# Altium PCB 28Pins_Schematic_V1I1_PCB.PcbDoc (part 3 of 5)
Units mm, origin at the board's own origin, x right, y up, seen from the top; angles counter-clockwise.
Board outline 68.58 x 53.34 mm, 2 copper layers (L1, L2), stack 1.67 mm thick; 106 components, 72 nets, 323 pads, 86 vias.
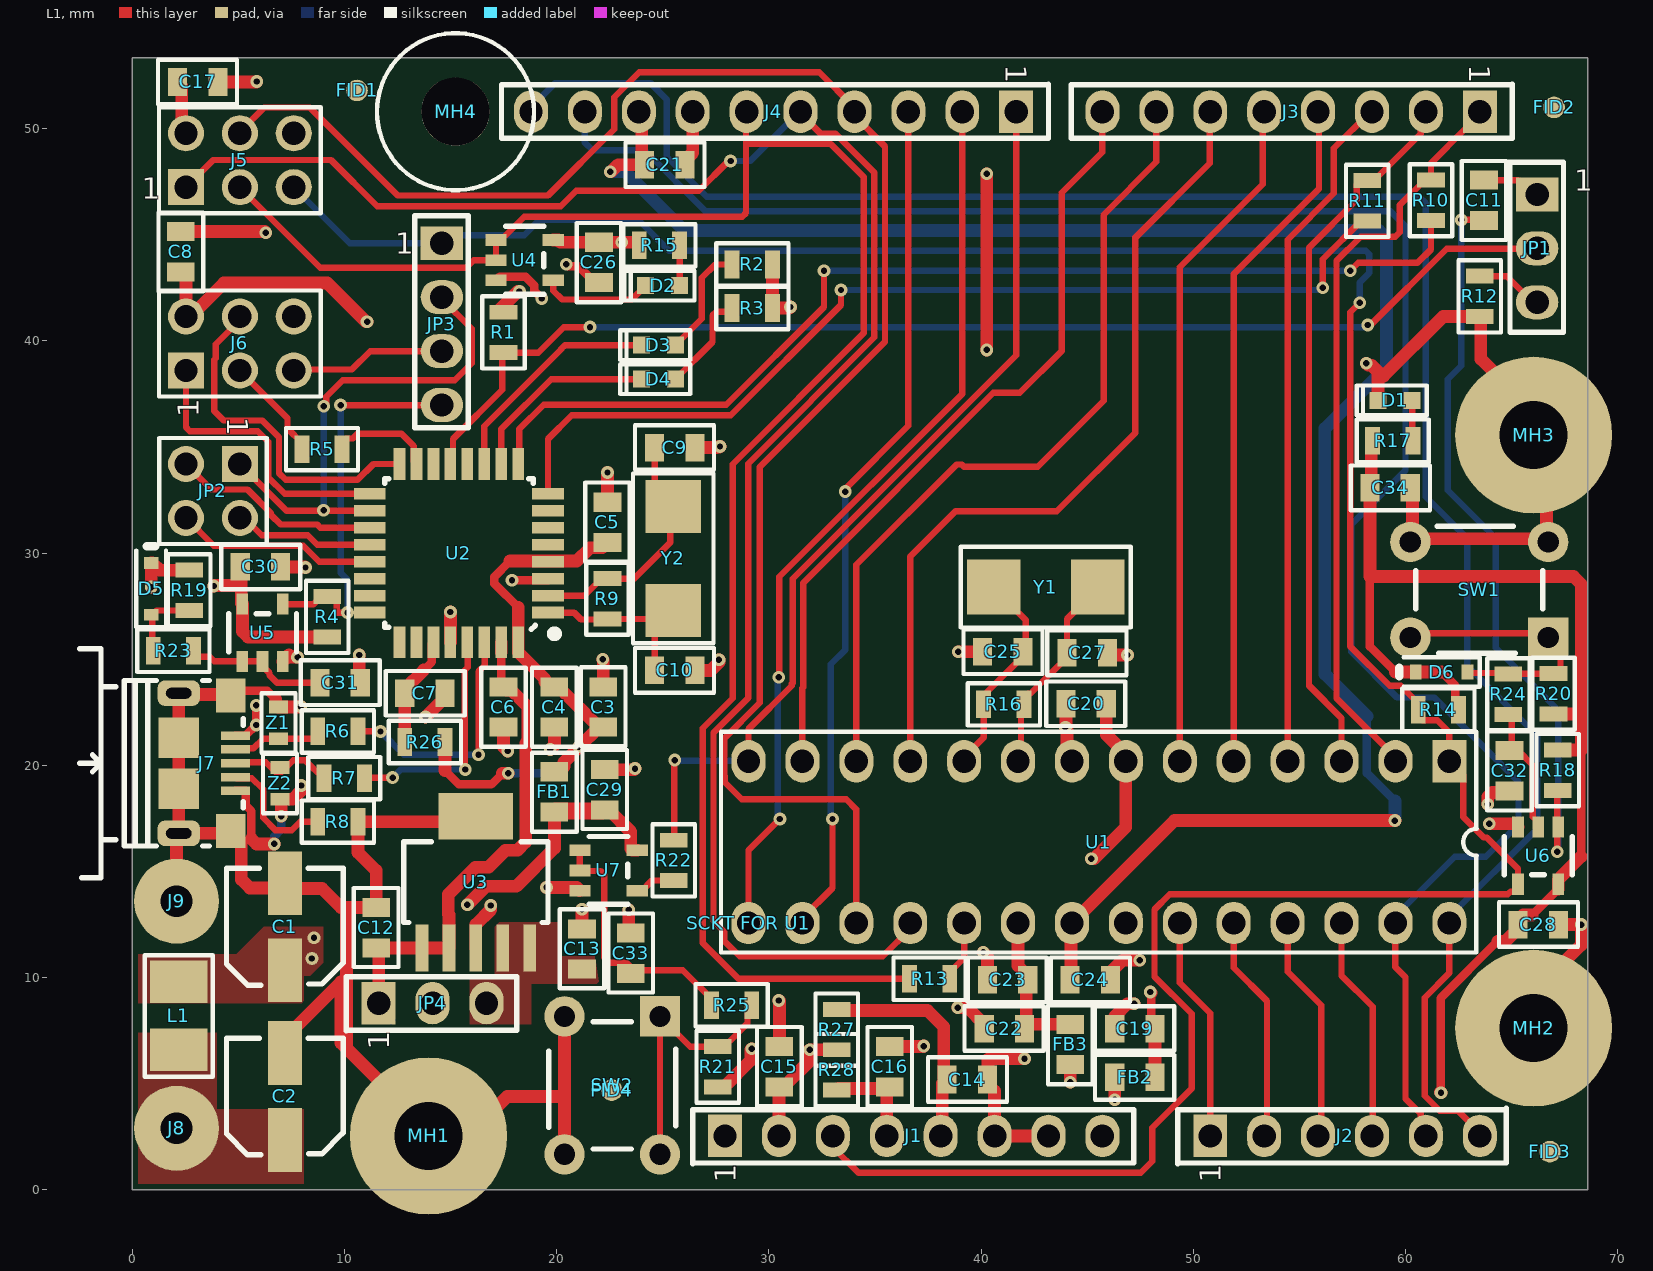
[diagram p0: L1 view]

## Part data (continued)
R4 R14 R18 R19 R20 R21: library part RC0805FR-0710KL, "Res Thick Film 0805 10K Ohm 1% 0.125W(1/8W) +/-100ppm/C Epoxy Pad SMD T/R", Case Code (Imperial)=0805, Manufacturer="Yageo Group", Max Operating Temperature=155°C, Max Power Dissipation=125mW, Min Operating Temperature=-55°C, Resistance=10kΩ, Supplier Part Number 1=311-10.0KCRCT-ND, Temperature Coefficient=100ppm/°C, Tolerance=1%, Voltage Rating=150V, Case/Package=0805, Category="Chip SMD Resistors", China RoHS=Non-Compliant, ComponentLink1Description=https://datasheet.octopart.com:443/RC0805FR-0710KL-Yageo-datasheet-175887523.pdf?src-supplier=IHS, ComponentLink1URL=https://datasheet.octopart.com:443/RC0805FR-0710KL-Yageo-datasheet-175887523.pdf?src-supplier=IHS, ComponentLink2Description=https://datasheet.octopart.com:443/RC0805FR-0710KL-Yageo-datasheet-62067350.pdf?src-supplier=Farnell, ComponentLink2URL=https://datasheet.octopart.com:443/RC0805FR-0710KL-Yageo-datasheet-62067350.pdf?src-supplier=Farnell, ComponentLink3Description=https://datasheet.octopart.com:443/RC0805FR-0710KL-Yageo-datasheet-13691069.pdf?src-supplier=Farnell, ComponentLink3URL=https://datasheet.octopart.com:443/RC0805FR-0710KL-Yageo-datasheet-13691069.pdf?src-supplier=Farnell, ComponentLink4Description=https://datasheet.octopart.com:443/RC0805FR-0710KL-Yageo-datasheet-103092701.pdf?src-supplier=Upverter, ComponentLink4URL=https://datasheet.octopart.com:443/RC0805FR-0710KL-Yageo-datasheet-103092701.pdf?src-supplier=Upverter, ComponentLink5Description=https://datasheet.octopart.com:443/RC0805FR-0710KL-Yageo-datasheet-98239111.pdf?src-supplier=Upverter, ComponentLink5URL=https://datasheet.octopart.com:443/RC0805FR-0710KL-Yageo-datasheet-98239111.pdf?src-supplier=Upverter, ComponentLink6Description=https://datasheet.octopart.com:443/RC0805FR-0710KL-Yageo---Phycomp-datasheet-67302840.pdf?src-supplier=Upverter, ComponentLink6URL=https://datasheet.octopart.com:443/RC0805FR-0710KL-Yageo---Phycomp-datasheet-67302840.pdf?src-supplier=Upverter, ComponentLink7Description=https://datasheet.octopart.com:443/RC0805FR-0710KL-Yageo-datasheet-8330313.pdf?src-supplier=element14+APAC, ComponentLink7URL=https://datasheet.octopart.com:443/RC0805FR-0710KL-Yageo-datasheet-8330313.pdf?src-supplier=element14+APAC, ComponentLink8Description=https://datasheet.octopart.com:443/RC0805FR-0710KL-Yageo-datasheet-12592811.pdf?src-supplier=element14+APAC, ComponentLink8URL=https://datasheet.octopart.com:443/RC0805FR-0710KL-Yageo-datasheet-12592811.pdf?src-supplier=element14+APAC, ComponentLink9Description=https://datasheet.octopart.com:443/RC0805FR-0710KL-Yageo-datasheet-164759695.pdf?src-supplier=Future+Electronics, ComponentLink9URL=https://datasheet.octopart.com:443/RC0805FR-0710KL-Yageo-datasheet-164759695.pdf?src-supplier=Future+Electronics, ComponentLink10Description=https://datasheet.octopart.com:443/RC0805FR-0710KL-Yageo-datasheet-15800360.pdf?src-supplier=Future+Electronics, ComponentLink10URL=https://datasheet.octopart.com:443/RC0805FR-0710KL-Yageo-datasheet-15800360.pdf?src-supplier=Future+Electronics, ComponentLink11Description=https://datasheet.octopart.com:443/RC0805FR-0710KL-Yageo-datasheet-8324252.pdf?src-supplier=Future+Electronics, ComponentLink11URL=https://datasheet.octopart.com:443/RC0805FR-0710KL-Yageo-datasheet-8324252.pdf?src-supplier=Future+Electronics, ComponentLink12Description=https://datasheet.octopart.com:443/RC0805FR-0710KL-Yageo-datasheet-79472498.pdf?src-supplier=Megastar, ComponentLink12URL=https://datasheet.octopart.com:443/RC0805FR-0710KL-Yageo-datasheet-79472498.pdf?src-supplier=Megastar, ComponentLink13Description=https://datasheet.octopart.com:443/RC0805FR-0710KL-Yageo-datasheet-27714392.pdf?src-supplier=Seeed+Studio, ComponentLink13URL=https://datasheet.octopart.com:443/RC0805FR-0710KL-Yageo-datasheet-27714392.pdf?src-supplier=Seeed+Studio, ComponentLink14Description=https://datasheet.octopart.com/RC0805FR-0710KL-Yageo-datasheet-73766026.pdf, ComponentLink14URL=https://datasheet.octopart.com/RC0805FR-0710KL-Yageo-datasheet-73766026.pdf, ComponentLink15Description=https://datasheet.octopart.com:443/RC0805FR-0710KL-Yageo-datasheet-118657.pdf?src-supplier=DigiKey, ComponentLink15URL=https://datasheet.octopart.com:443/RC0805FR-0710KL-Yageo-datasheet-118657.pdf?src-supplier=DigiKey, ComponentLink16Description=https://datasheet.octopart.com:443/RC0805FR-0710KL-Yageo-datasheet-502840.pdf?src-supplier=element14, ComponentLink16URL=https://datasheet.octopart.com:443/RC0805FR-0710KL-Yageo-datasheet-502840.pdf?src-supplier=element14, ComponentLink17Description=http://sigma.octopart.com:80/rohs_statement/Yageo-company-2.pdf?src-supplier=Compliance+Statements, ComponentLink17URL=http://sigma.octopart.com:80/rohs_statement/Yageo-company-2.pdf?src-supplier=Compliance+Statements, ComponentLink18Description=http://sigma.octopart.com:80/conflict_mineral_statement/Yageo-company-3.pdf?src-supplier=Compliance+Statements, ComponentLink18URL=http://sigma.octopart.com:80/conflict_mineral_statement/Yageo-company-3.pdf?src-supplier=Compliance+Statements, Composition="Thick Film", Depth=1.25mm, Features="Moisture Resistant", Height=500µm, Lead Free="Lead Free", Length=2mm, Lifecycle Status=Production, Manufacturer Part Number=RC0805FR-0710KL, Military Standard=Not, Mount="Surface Mount", Number of Pins=2, Number of Terminals=2, Number of Terminations=2, Packaging="Tape and Reel", Power Dissipation=125mW, Power Rating=125mW, Pricing 1="1=0.15, 10=0.016, 25=0.0136, 50=0.0112, 100=0.0071, 5000=0.0051, 10000=0.00453, 15000=0.00435, 25000=0.00426, 120000=0.00398, 125000=0.00396 (USD)", REACH SVHC=Yes, RoHS=Compliant, Schedule B="8533210045, 8533210045|8533210045|8533210045|8533210045|8533210045|8533210045|8533210045|8533210045|8533210045|8533210045|8533210045|8533210045|8533210045|8533210045|8533210045|8533210045|8533210045|8533210045|8533210045|8533210045|8533210045|8533210045|8533210045|85", Stock 1=3015885, Supplier 1=DigiKey, Termination=SMD/SMT, Voltage Rating (AC)=150V, Width=1.25mm, Working Voltage=150V
R5 R6 R7 R13 R23 R24 R25: library part AR0805FR-0722RL, "Chip Resistor with Ni/Au Terminations Thick Film 0805 22Ohm 1% Paper T/R", Case/Package=0805, Manufacturer="Yageo Group", Max Operating Temperature=155°C, Max Power Dissipation=125mW, Min Operating Temperature=-55°C, Resistance=22Ω, Supplier Part Number 1=AR0805FR-0722RL-ND, Temperature Coefficient=100ppm/°C, Tolerance=1%, Working Voltage=150V, Category="Chip SMD Resistors", China RoHS=Non-Compliant, ComponentLink1Description=https://datasheet.octopart.com:443/AR0805FR-0722RL-Yageo-datasheet-13033997.pdf?src-supplier=IHS, ComponentLink1URL=https://datasheet.octopart.com:443/AR0805FR-0722RL-Yageo-datasheet-13033997.pdf?src-supplier=IHS, ComponentLink2Description=http://sigma.octopart.com:80/rohs_statement/Yageo-company-2.pdf?src-supplier=Compliance+Statements, ComponentLink2URL=http://sigma.octopart.com:80/rohs_statement/Yageo-company-2.pdf?src-supplier=Compliance+Statements, ComponentLink3Description=http://sigma.octopart.com:80/conflict_mineral_statement/Yageo-company-3.pdf?src-supplier=Compliance+Statements, ComponentLink3URL=http://sigma.octopart.com:80/conflict_mineral_statement/Yageo-company-3.pdf?src-supplier=Compliance+Statements, Composition="Thick Film", Features="Moisture Resistant", Height=500µm, Length=2.0066mm, Lifecycle Status=Production, Manufacturer Part Number=AR0805FR-0722RL, Mount="Surface Mount", Number of Terminals=2, Number of Terminations=2, Packaging="Tape & Reel", Power Dissipation=125mW, Pricing 1="5000=0.08092 (USD)", REACH SVHC=Yes, RoHS=Compliant, Supplier 1=DigiKey, Width=1.25mm
R8 R26 R27 R28: library part RC0805JR-070RP, "Zero Ohm Resistor, Jumper, 0805 [2012 Metric], Thick Film, 125 mW, 2 A, Surface Mount Device", Case Code (Imperial)=0805, Case Code (Metric)=2012, Manufacturer="Yageo Group", Max Operating Temperature=155°C, Max Power Dissipation=125mW, Min Operating Temperature=-55°C, Resistance=0Ω, Supplier Part Number 1=YAG1327DKR-ND, Case/Package=0805, Category="Chip SMD Resistors", China RoHS=Compliant, ComponentLink1Description=https://datasheet.octopart.com:443/RC0805JR-070RP-Yageo-datasheet-182189537.pdf?src-supplier=IHS, ComponentLink1URL=https://datasheet.octopart.com:443/RC0805JR-070RP-Yageo-datasheet-182189537.pdf?src-supplier=IHS, ComponentLink2Description=https://datasheet.octopart.com:443/RC0805JR-070RP-Yageo-Group-datasheet-165992757.pdf?src-supplier=ODG+(Origin+Data+Global), ComponentLink2URL=https://datasheet.octopart.com:443/RC0805JR-070RP-Yageo-Group-datasheet-165992757.pdf?src-supplier=ODG+(Origin+Data+Global), ComponentLink3Description=http://sigma.octopart.com:80/rohs_statement/Yageo-company-2.pdf?src-supplier=Compliance+Statements, ComponentLink3URL=http://sigma.octopart.com:80/rohs_statement/Yageo-company-2.pdf?src-supplier=Compliance+Statements, ComponentLink4Description=http://sigma.octopart.com:80/conflict_mineral_statement/Yageo-company-3.pdf?src-supplier=Compliance+Statements, ComponentLink4URL=http://sigma.octopart.com:80/conflict_mineral_statement/Yageo-company-3.pdf?src-supplier=Compliance+Statements, Composition="Thick Film", Features="Moisture Resistant", Height=500µm, Length=2.0066mm, Lifecycle Status=Production, Manufacturer Part Number=RC0805JR-070RP, Mount="Surface Mount", Number of Terminals=2, Number of Terminations=2, Power Dissipation=125mW, Pricing 1="1=0.1, 10=0.029, 25=0.0244, 50=0.0212, 100=0.0186, 250=0.01572, 500=0.01392, 1000=0.01238 (USD)", REACH SVHC=Yes, RoHS=Compliant, Stock 1=60533, Supplier 1=DigiKey, Width=1.25mm
R9 R16: library part RT0805BRE071ML, "Res Thin Film 0805 1M Ohm 0.1% 0.125W(1/8W) ±50ppm/C Pad SMD T/R", Case Code (Imperial)=0805, Manufacturer="Yageo Group", Max Operating Temperature=155°C, Min Operating Temperature=-55°C, Power Dissipation=125mW, Resistance=1MΩ, Supplier Part Number 1=YAG4967CT-ND, Temperature Coefficient=50ppm/°C, Tolerance=0.1%, Voltage Rating=150V, Case/Package=0805, Category="Chip SMD Resistors", China RoHS=Non-Compliant, ComponentLink1Description=https://datasheet.octopart.com:443/RT0805BRE071ML-Yageo-datasheet-176402239.pdf?src-supplier=Newark, ComponentLink1URL=https://datasheet.octopart.com:443/RT0805BRE071ML-Yageo-datasheet-176402239.pdf?src-supplier=Newark, ComponentLink2Description=https://datasheet.octopart.com:443/RT0805BRE071ML-Yageo-datasheet-169971040.pdf?src-supplier=Future+Electronics, ComponentLink2URL=https://datasheet.octopart.com:443/RT0805BRE071ML-Yageo-datasheet-169971040.pdf?src-supplier=Future+Electronics, ComponentLink3Description=https://datasheet.octopart.com:443/RT0805BRE071ML-Yageo-datasheet-166250672.pdf?src-supplier=Future+Electronics, ComponentLink3URL=https://datasheet.octopart.com:443/RT0805BRE071ML-Yageo-datasheet-166250672.pdf?src-supplier=Future+Electronics, ComponentLink4Description=https://datasheet.octopart.com:443/RT0805BRE071ML-Yageo-datasheet-141265893.pdf?src-supplier=Future+Electronics, ComponentLink4URL=https://datasheet.octopart.com:443/RT0805BRE071ML-Yageo-datasheet-141265893.pdf?src-supplier=Future+Electronics, ComponentLink5Description=https://datasheet.octopart.com/RT0805BRE071ML-Yageo-datasheet-86813807.pdf, ComponentLink5URL=https://datasheet.octopart.com/RT0805BRE071ML-Yageo-datasheet-86813807.pdf, ComponentLink6Description=http://sigma.octopart.com:80/rohs_statement/Yageo-company-2.pdf?src-supplier=Compliance+Statements, ComponentLink6URL=http://sigma.octopart.com:80/rohs_statement/Yageo-company-2.pdf?src-supplier=Compliance+Statements, ComponentLink7Description=http://sigma.octopart.com:80/conflict_mineral_statement/Yageo-company-3.pdf?src-supplier=Compliance+Statements, ComponentLink7URL=http://sigma.octopart.com:80/conflict_mineral_statement/Yageo-company-3.pdf?src-supplier=Compliance+Statements, Composition="Thin Film", Contact Plating=Tin, Height=500µm, Lead Free="Lead Free", Length=2mm, Lifecycle Status=Production, Manufacturer Part Number=RT0805BRE071ML, Mount="Surface Mount", Number of Terminals=2, Power Rating=125mW, Pricing 1="1=0.23, 10=0.15, 25=0.1424, 50=0.1346, 100=0.1178, 250=0.10096, 500=0.0773 (USD)", Radiation Hardening=No, REACH SVHC=Yes, RoHS=Compliant, Stock 1=10247, Supplier 1=DigiKey, Termination=SMD/SMT, Voltage Rating (DC)=150V, Width=1.25mm, Working Voltage=150V
R10 R11 R12: library part AT0805FRE071KL, "Fixed Resistor, Thin Film, 0.125W, 1000ohm, 150V, 1% +/-Tol, 50ppm/Cel, Surface Mount, 0805", Case/Package=0805, Manufacturer="Yageo Group", Max Operating Temperature=155°C, Min Operating Temperature=-55°C, Power Dissipation=125mW, Resistance=1kΩ, Supplier Part Number 1=13-AT0805FRE071KLCT-ND, Temperature Coefficient=50ppm/°C, Tolerance=1%, Voltage Rating=150V, Category="Chip SMD Resistors", China RoHS=Compliant, ComponentLink1Description=https://datasheet.octopart.com:443/AT0805FRE071KL-Yageo-datasheet-182189409.pdf?src-supplier=IHS, ComponentLink1URL=https://datasheet.octopart.com:443/AT0805FRE071KL-Yageo-datasheet-182189409.pdf?src-supplier=IHS, ComponentLink2Description=https://datasheet.octopart.com:443/AT0805FRE071KL-Yageo-datasheet-153645570.pdf?src-supplier=Upverter, ComponentLink2URL=https://datasheet.octopart.com:443/AT0805FRE071KL-Yageo-datasheet-153645570.pdf?src-supplier=Upverter, ComponentLink3Description=https://sigma.octopart.com:443/138820526/technical_drawing/Yageo-AT0805FRE071KL.pdf?src-supplier=Upverter, ComponentLink3URL=https://sigma.octopart.com:443/138820526/technical_drawing/Yageo-AT0805FRE071KL.pdf?src-supplier=Upverter, ComponentLink4Description=http://sigma.octopart.com:80/conflict_mineral_statement/Yageo-company-3.pdf?src-supplier=Compliance+Statements, ComponentLink4URL=http://sigma.octopart.com:80/conflict_mineral_statement/Yageo-company-3.pdf?src-supplier=Compliance+Statements, ComponentLink5Description=http://sigma.octopart.com:80/rohs_statement/Yageo-company-2.pdf?src-supplier=Compliance+Statements, ComponentLink5URL=http://sigma.octopart.com:80/rohs_statement/Yageo-company-2.pdf?src-supplier=Compliance+Statements, Composition="Thin Film", Height=500µm, Lifecycle Status=Production, Manufacturer Part Number=AT0805FRE071KL, Mount="Surface Mount", Number of Terminals=2, Power Rating=125mW, Pricing 1="1=0.39, 10=0.286, 25=0.2428, 50=0.2, 100=0.1754, 250=0.15096, 500=0.11846 (USD)", REACH SVHC=Yes, RoHS=Compliant, Stock 1=4559, Supplier 1=DigiKey, Width=1.25mm, Working Voltage=150V
"SCKT FOR U1": library part 4828-3004-CP, "IC Socket, DIP28, 28 Contact(s), 2.54mm Term Pitch, 7.62mm Row Spacing, Solder", Current Rating=1A, Insulation Resistance=5GΩ, Manufacturer=3M, Max Operating Temperature=85°C, Min Operating Temperature=-25°C, Supplier Part Number 1=3M5480-ND, Category=Connectors, China RoHS=Compliant, ComponentLink1Description=https://datasheet.octopart.com:443/4828-3004-CP-3M-datasheet-11754339.pdf?src-supplier=element14+APAC, ComponentLink1URL=https://datasheet.octopart.com:443/4828-3004-CP-3M-datasheet-11754339.pdf?src-supplier=element14+APAC, ComponentLink2Description=https://datasheet.octopart.com:443/4828-3004-CP-3M-datasheet-125432.pdf?src-supplier=Verical, ComponentLink2URL=https://datasheet.octopart.com:443/4828-3004-CP-3M-datasheet-125432.pdf?src-supplier=Verical, ComponentLink3Description=https://datasheet.octopart.com:443/4828-3004-CP-3M-datasheet-110561487.pdf?src-supplier=RS+(Formerly+Allied+Electronics), ComponentLink3URL=https://datasheet.octopart.com:443/4828-3004-CP-3M-datasheet-110561487.pdf?src-supplier=RS+(Formerly+Allied+Electronics), ComponentLink4Description=https://datasheet.octopart.com:443/4828-3004-CP-3M-datasheet-12002015.pdf?src-supplier=RS+(Formerly+Allied+Electronics), ComponentLink4URL=https://datasheet.octopart.com:443/4828-3004-CP-3M-datasheet-12002015.pdf?src-supplier=RS+(Formerly+Allied+Electronics), ComponentLink5Description=http://sigma.octopart.com:80/conflict_mineral_statement/3M-company-24.pdf?src-supplier=Compliance+Statements, ComponentLink5URL=http://sigma.octopart.com:80/conflict_mineral_statement/3M-company-24.pdf?src-supplier=Compliance+Statements, Connector Type="DIP, Socket", Contact Material=Bronze, Contact Plating=Tin, Depth=5.08mm, Gender=Female, Housing Material=Glass, Lead Free="Lead Free", Length=35.43mm, Lifecycle Status=Production, Manufacturer Part Number=4828-3004-CP, Mount="Through Hole", Number of Contacts=28, Number of Pins=28, Number of Positions=28, Number of Rows=2, Orientation=Straight, Pitch=2.54mm, Pricing 1="1=0.96, 14=0.79786, 28=0.75929, 56=0.72304, 112=0.68848, 252=0.65016, 504=0.61911, 1008=0.58954, 2506=0.55285 (USD)", REACH SVHC=Yes, RoHS=Compliant, Row Spacing=7.62mm, Stock 1=5321, Supplier 1=DigiKey, Terminal Pitch=2.54mm, Termination=Solder, Width=10.16mm
SW1 SW2: "Switch Tactile OFF (ON) SPST Round Button PC Pins 0.05A 24VDC 1.57N Thru-Hole Loose", Color=Black, Contact Current Rating=50mA, Contact Resistance=100mΩ, Insulation Resistance=100MΩ, Manufacturer="TE Connectivity", Manufacturer Lifecycle Status=ACTIVE, Max Operating Temperature=85°C, Max Voltage Rating (DC)=24V, Min Operating Temperature=-35°C, Operating Force=1.568N, Supplier Part Number 1=450-1650-ND, Actuator Length=1.397mm, Actuator Material="PBT, Polyacetal, Resin", Category="Pushbutton Switches", China RoHS=Compliant, ComponentLink1Description=https://datasheet.octopart.com:443/1825910-6-TE-Connectivity-datasheet-10294628.pdf?src-supplier=Newark, ComponentLink1URL=https://datasheet.octopart.com:443/1825910-6-TE-Connectivity-datasheet-10294628.pdf?src-supplier=Newark, ComponentLink2Description=https://datasheet.octopart.com:443/1825910-6-TE-Connectivity-datasheet-179971975.pdf?src-supplier=IHS, ComponentLink2URL=https://datasheet.octopart.com:443/1825910-6-TE-Connectivity-datasheet-179971975.pdf?src-supplier=IHS, ComponentLink3Description=https://datasheet.octopart.com:443/FSM4JH-TE-Connectivity---AMP-datasheet-512274.pdf?src-supplier=IHS, ComponentLink3URL=https://datasheet.octopart.com:443/FSM4JH-TE-Connectivity---AMP-datasheet-512274.pdf?src-supplier=IHS, ComponentLink4Description=https://datasheet.octopart.com:443/1825910-6-TE-Connectivity---Alcoswitch-datasheet-181441334.pdf?src-supplier=IHS, ComponentLink4URL=https://datasheet.octopart.com:443/1825910-6-TE-Connectivity---Alcoswitch-datasheet-181441334.pdf?src-supplier=IHS, ComponentLink5Description=https://datasheet.octopart.com:443/FSM4JH-TE-Connectivity-datasheet-181317608.pdf?src-supplier=IHS, ComponentLink5URL=https://datasheet.octopart.com:443/FSM4JH-TE-Connectivity-datasheet-181317608.pdf?src-supplier=IHS, ComponentLink6Description=https://sigma.octopart.com:443/101748000/technical_drawing/TE-Connectivity-1825910-6.pdf?src-supplier=Sager+Electronics, ComponentLink6URL=https://sigma.octopart.com:443/101748000/technical_drawing/TE-Connectivity-1825910-6.pdf?src-supplier=Sager+Electronics, ComponentLink7Description=https://sigma.octopart.com:443/12291753/technical_drawing/TE-Connectivity-1825910-6.pdf?src-supplier=Burklin+Elektronik, ComponentLink7URL=https://sigma.octopart.com:443/12291753/technical_drawing/TE-Connectivity-1825910-6.pdf?src-supplier=Burklin+Elektronik, ComponentLink8Description=https://datasheet.octopart.com:443/FSM4JH-Tyco-Electronics-datasheet-5302851.pdf?src-supplier=Upverter, ComponentLink8URL=https://datasheet.octopart.com:443/FSM4JH-Tyco-Electronics-datasheet-5302851.pdf?src-supplier=Upverter, ComponentLink9Description=https://sigma.octopart.com:443/58177301/technical_drawing/TE-Connectivity-1825910-6.pdf?src-supplier=TE+Connectivity, ComponentLink9URL=https://sigma.octopart.com:443/58177301/technical_drawing/TE-Connectivity-1825910-6.pdf?src-supplier=TE+Connectivity, ComponentLink10Description=https://datasheet.octopart.com:443/1825910-6-TE-Connectivity-datasheet-33021037.pdf?src-supplier=Farnell, ComponentLink10URL=https://datasheet.octopart.com:443/1825910-6-TE-Connectivity-datasheet-33021037.pdf?src-supplier=Farnell, ComponentLink11Description=https://datasheet.octopart.com:443/FSM4JH-Tyco-Electronics-datasheet-12163206.pdf?src-supplier=Farnell, ComponentLink11URL=https://datasheet.octopart.com:443/FSM4JH-Tyco-Electronics-datasheet-12163206.pdf?src-supplier=Farnell, ComponentLink12Description=https://datasheet.octopart.com:443/FSM4JH-Alcoswitch-datasheet-41434433.pdf?src-supplier=Master+Electronics, ComponentLink12URL=https://datasheet.octopart.com:443/FSM4JH-Alcoswitch-datasheet-41434433.pdf?src-supplier=Master+Electronics, ComponentLink13Description=https://datasheet.octopart.com:443/1825910-6-TE-Connectivity---AMP-datasheet-189108451.pdf?src-supplier=Master+Electronics, ComponentLink13URL=https://datasheet.octopart.com:443/1825910-6-TE-Connectivity---AMP-datasheet-189108451.pdf?src-supplier=Master+Electronics, ComponentLink14Description=https://datasheet.octopart.com:443/1825910-6-TE-Connectivity-datasheet-145419878.pdf?src-supplier=RS+(Formerly+Allied+Electronics), ComponentLink14URL=https://datasheet.octopart.com:443/1825910-6-TE-Connectivity-datasheet-145419878.pdf?src-supplier=RS+(Formerly+Allied+Electronics), ComponentLink15Description=https://datasheet.octopart.com:443/FSM4JH-Agastat-datasheet-15984561.pdf?src-supplier=RS+(Formerly+Allied+Electronics), ComponentLink15URL=https://datasheet.octopart.com:443/FSM4JH-Agastat-datasheet-15984561.pdf?src-supplier=RS+(Formerly+Allied+Electronics), ComponentLink16Description=https://datasheet.octopart.com:443/1825910-6-TE-Connectivity-datasheet-140613545.pdf?src-supplier=TME, ComponentLink16URL=https://datasheet.octopart.com:443/1825910-6-TE-Connectivity-datasheet-140613545.pdf?src-supplier=TME, ComponentLink17Description=https://datasheet.octopart.com:443/1825910-6-TE-Connectivity---AMP-datasheet-23715110.pdf?src-supplier=Electro+Sonic, ComponentLink17URL=https://datasheet.octopart.com:443/1825910-6-TE-Connectivity---AMP-datasheet-23715110.pdf?src-supplier=Electro+Sonic, ComponentLink18Description=http://sigma.octopart.com:80/14574207/rohs_statement/TE-Connectivity-1825910-6.pdf?src-supplier=Compliance+Statements, ComponentLink18URL=http://sigma.octopart.com:80/14574207/rohs_statement/TE-Connectivity-1825910-6.pdf?src-supplier=Compliance+Statements, ComponentLink19Description=http://sigma.octopart.com:80/41598133/materials_sheet/TE-Connectivity-1825910-6.pdf?src-supplier=Compliance+Statements, ComponentLink19URL=http://sigma.octopart.com:80/41598133/materials_sheet/TE-Connectivity-1825910-6.pdf?src-supplier=Compliance+Statements, ComponentLink20Description=http://sigma.octopart.com:80/78006367/materials_sheet/TE-Connectivity-1825910-6.pdf?src-supplier=Compliance+Statements, ComponentLink20URL=http://sigma.octopart.com:80/78006367/materials_sheet/TE-Connectivity-1825910-6.pdf?src-supplier=Compliance+Statements, ComponentLink21Description=http://sigma.octopart.com:80/136693561/materials_sheet/TE-Connectivity-1825910-6.pdf?src-supplier=Compliance+Statements, ComponentLink21URL=http://sigma.octopart.com:80/136693561/materials_sheet/TE-Connectivity-1825910-6.pdf?src-supplier=Compliance+Statements, ComponentLink22Description=http://sigma.octopart.com:80/14555950/rohs_certificate/Agastat-FSM4JH.pdf?src-supplier=Compliance+Statements, ComponentLink22URL=http://sigma.octopart.com:80/14555950/rohs_certificate/Agastat-FSM4JH.pdf?src-supplier=Compliance+Statements, Contact Material=Copper, Contact Plating=Silver, Current Rating=50mA, Electrical Life=100kcycles, ELV=Compliant, Height=3.61mm, Housing Material=Nylon, Illumination Type="Illuminated, Non-Illuminated", Lead Free="Lead Free", Length=5.99mm, Life (Cycles)=100kcycles, Lifecycle Status=Production, Manufacturer Part Number=1825910-6, Material=Nylon, Max Current Rating=50mA, Mechanical Life=100kcycles, Mount="Through Hole", Number of Positions=1, Orientation=Straight, Packaging=Bulk, Pricing 1="1=0.13, 10=0.118, 25=0.1112, 100=0.1001, 250=0.093, 750=0.08485, 1500=0.08009, 3000=0.07565, 5250=0.07234 (USD)", REACH SVHC=Yes, RoHS=Compliant, Stock 1=107767, Supplier 1=DigiKey, Switch Function=Off-Mom, Switch Travel=250µm, Termination="PC Pin, PC Pins", Throw Configuration=SPST, Type=Switch, Voltage Rating (DC)=24V, Width=6mm
U1: "Microchip - ATMEGA328P-PU - Microcontroller Mcu, 8 Bit, Atmega, 20MHZ, DIP-28", Case/Package=PDIP, Frequency=20MHz, Manufacturer=Microchip, Max Operating Temperature=85°C, Max Supply Voltage=5.5V, Min Operating Temperature=-40°C, Min Supply Voltage=1.8V, Supplier Part Number 1=ATMEGA328P-PU-ND, Category=Microcontrollers, ComponentLink1Description=https://datasheet.octopart.com:443/ATMEGA328P-PU-Atmel-datasheet-34147914.pdf?src-supplier=Upverter, ComponentLink1URL=https://datasheet.octopart.com:443/ATMEGA328P-PU-Atmel-datasheet-34147914.pdf?src-supplier=Upverter, ComponentLink2Description=https://datasheet.octopart.com:443/ATMEGA328P-PU-Microchip-datasheet-14421303.pdf?src-supplier=Upverter, ComponentLink2URL=https://datasheet.octopart.com:443/ATMEGA328P-PU-Microchip-datasheet-14421303.pdf?src-supplier=Upverter, ComponentLink3Description=https://datasheet.octopart.com:443/ATMEGA328P-PU-Atmel-datasheet-14353408.pdf?src-supplier=Upverter, ComponentLink3URL=https://datasheet.octopart.com:443/ATMEGA328P-PU-Atmel-datasheet-14353408.pdf?src-supplier=Upverter, ComponentLink4Description=https://datasheet.octopart.com:443/ATMEGA328P-PU-Microchip-datasheet-68295846.pdf?src-supplier=SHENGYU+ELECTRONICS, ComponentLink4URL=https://datasheet.octopart.com:443/ATMEGA328P-PU-Microchip-datasheet-68295846.pdf?src-supplier=SHENGYU+ELECTRONICS, ComponentLink5Description=https://datasheet.octopart.com:443/ATMEGA328P-PU-Microchip-datasheet-133520744.pdf?src-supplier=LKR, ComponentLink5URL=https://datasheet.octopart.com:443/ATMEGA328P-PU-Microchip-datasheet-133520744.pdf?src-supplier=LKR, ComponentLink6Description=https://datasheet.octopart.com:443/ATMEGA328P-PU-Microchip-datasheet-62316222.pdf?src-supplier=element14+APAC, ComponentLink6URL=https://datasheet.octopart.com:443/ATMEGA328P-PU-Microchip-datasheet-62316222.pdf?src-supplier=element14+APAC, ComponentLink7Description=https://datasheet.octopart.com:443/ATMEGA328P-PU-Atmel-datasheet-13381135.pdf?src-supplier=element14+APAC, ComponentLink7URL=https://datasheet.octopart.com:443/ATMEGA328P-PU-Atmel-datasheet-13381135.pdf?src-supplier=element14+APAC, ComponentLink8Description=https://datasheet.octopart.com:443/ATMEGA328P-PU-Microchip-datasheet-147334532.pdf?src-supplier=Microchip, ComponentLink8URL=https://datasheet.octopart.com:443/ATMEGA328P-PU-Microchip-datasheet-147334532.pdf?src-supplier=Microchip, ComponentLink9Description=https://datasheet.octopart.com:443/ATMEGA328P-PU-Microchip-datasheet-148646239.pdf?src-supplier=Microchip, ComponentLink9URL=https://datasheet.octopart.com:443/ATMEGA328P-PU-Microchip-datasheet-148646239.pdf?src-supplier=Microchip, ComponentLink10Description=https://datasheet.octopart.com:443/ATMEGA328P-PU-Microchip-datasheet-154741723.pdf?src-supplier=Electro+Sonic, ComponentLink10URL=https://datasheet.octopart.com:443/ATMEGA328P-PU-Microchip-datasheet-154741723.pdf?src-supplier=Electro+Sonic, ComponentLink11Description=https://datasheet.octopart.com:443/ATMEGA328P-PU-Microchip-datasheet-100453898.pdf?src-supplier=Burklin+Elektronik, ComponentLink11URL=https://datasheet.octopart.com:443/ATMEGA328P-PU-Microchip-datasheet-100453898.pdf?src-supplier=Burklin+Elektronik, ComponentLink12Description=https://datasheet.octopart.com:443/ATMEGA328P-PU-Atmel-datasheet-30457899.pdf?src-supplier=Seeed+Studio, ComponentLink12URL=https://datasheet.octopart.com:443/ATMEGA328P-PU-Atmel-datasheet-30457899.pdf?src-supplier=Seeed+Studio, ComponentLink13Description=https://datasheet.octopart.com:443/ATMEGA328P-PU-Microchip-datasheet-10842036.pdf?src-supplier=SOS+electronic, ComponentLink13URL=https://datasheet.octopart.com:443/ATMEGA328P-PU-Microchip-datasheet-10842036.pdf?src-supplier=SOS+electronic, ComponentLink14Description=https://datasheet.octopart.com:443/ATMEGA328P-PU-Microchip-datasheet-8364063.pdf?src-supplier=Jameco, ComponentLink14URL=https://datasheet.octopart.com:443/ATMEGA328P-PU-Microchip-datasheet-8364063.pdf?src-supplier=Jameco, ComponentLink15Description=https://datasheet.octopart.com:443/ATMEGA328P-PU-Microchip-datasheet-154323124.pdf?src-supplier=Jameco, ComponentLink15URL=https://datasheet.octopart.com:443/ATMEGA328P-PU-Microchip-datasheet-154323124.pdf?src-supplier=Jameco, ComponentLink16Description=https://datasheet.octopart.com:443/ATMEGA328P-PU-Atmel-datasheet-10389530.pdf?src-supplier=Newark, ComponentLink16URL=https://datasheet.octopart.com:443/ATMEGA328P-PU-Atmel-datasheet-10389530.pdf?src-supplier=Newark, ComponentLink17Description=https://datasheet.octopart.com:443/ATMEGA328P-PU-Microchip-datasheet-65729177.pdf?src-supplier=TME, ComponentLink17URL=https://datasheet.octopart.com:443/ATMEGA328P-PU-Microchip-datasheet-65729177.pdf?src-supplier=TME, ComponentLink18Description=https://datasheet.octopart.com:443/ATMEGA328P-PU-Microchip-datasheet-101746195.pdf?src-supplier=Future+Electronics, ComponentLink18URL=https://datasheet.octopart.com:443/ATMEGA328P-PU-Microchip-datasheet-101746195.pdf?src-supplier=Future+Electronics, ComponentLink19Description=http://sigma.octopart.com:80/188450569/materials_sheet/Microchip-ATMEGA328P-PU.pdf?src-supplier=Compliance+Statements, ComponentLink19URL=http://sigma.octopart.com:80/188450569/materials_sheet/Microchip-ATMEGA328P-PU.pdf?src-supplier=Compliance+Statements, ComponentLink20Description=http://sigma.octopart.com:80/conflict_mineral_statement/Microchip-company-68.pdf?src-supplier=Compliance+Statements, ComponentLink20URL=http://sigma.octopart.com:80/conflict_mineral_statement/Microchip-company-68.pdf?src-supplier=Compliance+Statements, ComponentLink21Description=http://sigma.octopart.com:80/conflict_mineral_statement/Microchip-company-69.pdf?src-supplier=Compliance+Statements, ComponentLink21URL=http://sigma.octopart.com:80/conflict_mineral_statement/Microchip-company-69.pdf?src-supplier=Compliance+Statements, ComponentLink22Description=http://sigma.octopart.com:80/reach_statement/Microchip-company-70.pdf?src-supplier=Compliance+Statements, ComponentLink22URL=http://sigma.octopart.com:80/reach_statement/Microchip-company-70.pdf?src-supplier=Compliance+Statements, ComponentLink23Description=http://sigma.octopart.com:80/rohs_statement/Microchip-company-71.pdf?src-supplier=Compliance+Statements, ComponentLink23URL=http://sigma.octopart.com:80/rohs_statement/Microchip-company-71.pdf?src-supplier=Compliance+Statements, ComponentLink24Description=http://sigma.octopart.com:80/rohs_statement/Atmel-company-4.pdf?src-supplier=Compliance+Statements, ComponentLink24URL=http://sigma.octopart.com:80/rohs_statement/Atmel-company-4.pdf?src-supplier=Compliance+Statements, ComponentLink25Description=http://sigma.octopart.com:80/rohs_statement/Atmel-company-5.pdf?src-supplier=Compliance+Statements, ComponentLink25URL=http://sigma.octopart.com:80/rohs_statement/Atmel-company-5.pdf?src-supplier=Compliance+Statements, ComponentLink26Description=http://sigma.octopart.com:80/reach_statement/Atmel-company-6.pdf?src-supplier=Compliance+Statements, ComponentLink26URL=http://sigma.octopart.com:80/reach_statement/Atmel-company-6.pdf?src-supplier=Compliance+Statements, Contact Plating=Tin, Core Architecture=AVR, Country of Assembly=Thailand, Country of Fabrication="United States of America", Country of Origin=Thailand, Data Bus Width=8b, Export Control Classification Number (ECCN) Code=EAR99, Harmonized Tariff Schedule (HTS) Code=8542.31.0015, Height=3.28mm, Interface="2-Wire, I2C, SPI, UART, USART", Lead Free="Lead Free", Length=37.4mm, Lifecycle Status=Production, Manufacturer Part Number=ATMEGA328P-PU, Max Frequency=20MHz, Memory Size=32kB, Memory Type=FLASH, Mount="Through Hole", Number of ADC Channels=6, Number of I2C Channels=1, Number of I/Os=23, Number of Pins=28, Number of Programmable I/O=23, Number of PWM Channels=6, Number of SPI Channels=1, Number of Timers/Counters=3, Oscillator Type=Internal, Peripherals="Brown-out Detect/Reset, POR, PWM, WDT", Pricing 1="1=2.89, 25=2.65, 100=2.39 (USD)", Projected EOL Date=2039-11-04, Radiation Hardening=No, RAM Size=2kB, REACH SVHC=No, RoHS=Compliant, Schedule B="8542310000, 8542310000|8542310000|8542310000|8542310000|8542310000", Stock 1=58812, Supplier 1=DigiKey, Watchdog Timer=Yes, Width=6.76mm
U2: "Risc Microcontroller, 8-BIT, Flash, AVR Risc Cpu, 16MHZ, Cmos, PQFP32", Case/Package=TQFP, Frequency=16MHz, Manufacturer=Microchip, Max Operating Temperature=85°C, Max Supply Voltage=5.5V, Min Operating Temperature=-40°C, Min Supply Voltage=2.7V, Supplier Part Number 1=ATMEGA16U2-AU-ND, Category=Microcontrollers, ComponentLink1Description=https://datasheet.octopart.com:443/ATMEGA16U2-AU-Microchip-datasheet-14435305.pdf?src-supplier=LKR, ComponentLink1URL=https://datasheet.octopart.com:443/ATMEGA16U2-AU-Microchip-datasheet-14435305.pdf?src-supplier=LKR, ComponentLink2Description=https://datasheet.octopart.com:443/ATMEGA16U2-AU-Microchip-datasheet-13413706.pdf?src-supplier=Farnell, ComponentLink2URL=https://datasheet.octopart.com:443/ATMEGA16U2-AU-Microchip-datasheet-13413706.pdf?src-supplier=Farnell, ComponentLink3Description=https://datasheet.octopart.com:443/ATMEGA16U2-AU-Microchip-datasheet-175858400.pdf?src-supplier=Microchip, ComponentLink3URL=https://datasheet.octopart.com:443/ATMEGA16U2-AU-Microchip-datasheet-175858400.pdf?src-supplier=Microchip, ComponentLink4Description=https://datasheet.octopart.com:443/ATMEGA16U2-AU-Atmel-datasheet-24967522.pdf?src-supplier=Newark, ComponentLink4URL=https://datasheet.octopart.com:443/ATMEGA16U2-AU-Atmel-datasheet-24967522.pdf?src-supplier=Newark, ComponentLink5Description=https://datasheet.octopart.com:443/ATMEGA16U2-AU-Atmel-datasheet-10031542.pdf?src-supplier=_legacy+Avnet, ComponentLink5URL=https://datasheet.octopart.com:443/ATMEGA16U2-AU-Atmel-datasheet-10031542.pdf?src-supplier=_legacy+Avnet, ComponentLink6Description=https://datasheet.octopart.com:443/ATMEGA16U2-AU-Atmel-datasheet-8702439.pdf?src-supplier=_legacy+Avnet, ComponentLink6URL=https://datasheet.octopart.com:443/ATMEGA16U2-AU-Atmel-datasheet-8702439.pdf?src-supplier=_legacy+Avnet, ComponentLink7Description=https://datasheet.octopart.com:443/ATMEGA16U2-AU-Atmel-datasheet-8367484.pdf?src-supplier=_legacy+Avnet, ComponentLink7URL=https://datasheet.octopart.com:443/ATMEGA16U2-AU-Atmel-datasheet-8367484.pdf?src-supplier=_legacy+Avnet, ComponentLink8Description=http://sigma.octopart.com:80/188450247/materials_sheet/Microchip-ATMEGA16U2-AU.pdf?src-supplier=Compliance+Statements, ComponentLink8URL=http://sigma.octopart.com:80/188450247/materials_sheet/Microchip-ATMEGA16U2-AU.pdf?src-supplier=Compliance+Statements, ComponentLink9Description=http://sigma.octopart.com:80/conflict_mineral_statement/Microchip-company-68.pdf?src-supplier=Compliance+Statements, ComponentLink9URL=http://sigma.octopart.com:80/conflict_mineral_statement/Microchip-company-68.pdf?src-supplier=Compliance+Statements, ComponentLink10Description=http://sigma.octopart.com:80/conflict_mineral_statement/Microchip-company-69.pdf?src-supplier=Compliance+Statements, ComponentLink10URL=http://sigma.octopart.com:80/conflict_mineral_statement/Microchip-company-69.pdf?src-supplier=Compliance+Statements, ComponentLink11Description=http://sigma.octopart.com:80/reach_statement/Microchip-company-70.pdf?src-supplier=Compliance+Statements, ComponentLink11URL=http://sigma.octopart.com:80/reach_statement/Microchip-company-70.pdf?src-supplier=Compliance+Statements, ComponentLink12Description=http://sigma.octopart.com:80/rohs_statement/Microchip-company-71.pdf?src-supplier=Compliance+Statements, ComponentLink12URL=http://sigma.octopart.com:80/rohs_statement/Microchip-company-71.pdf?src-supplier=Compliance+Statements, ComponentLink13Description=http://sigma.octopart.com:80/rohs_statement/Atmel-company-4.pdf?src-supplier=Compliance+Statements, ComponentLink13URL=http://sigma.octopart.com:80/rohs_statement/Atmel-company-4.pdf?src-supplier=Compliance+Statements, ComponentLink14Description=http://sigma.octopart.com:80/rohs_statement/Atmel-company-5.pdf?src-supplier=Compliance+Statements, ComponentLink14URL=http://sigma.octopart.com:80/rohs_statement/Atmel-company-5.pdf?src-supplier=Compliance+Statements, ComponentLink15Description=http://sigma.octopart.com:80/reach_statement/Atmel-company-6.pdf?src-supplier=Compliance+Statements, ComponentLink15URL=http://sigma.octopart.com:80/reach_statement/Atmel-company-6.pdf?src-supplier=Compliance+Statements, Contact Plating=Tin, Core Architecture=AVR, Country of Assembly=Philippines, Country of Fabrication="United States of America", Country of Origin=Philippines, Data Bus Width=8b, Export Control Classification Number (ECCN) Code=EAR99, Harmonized Tariff Schedule (HTS) Code=8542.31.0015, Height=1.05mm, Interface="SPI, Serial, UART, USART, USB", Lead Free="Lead Free", Length=7mm, Lifecycle Status=Production, Manufacturer Part Number=ATMEGA16U2-AU, Max Frequency=16MHz, Memory Size=16kB, Memory Type=FLASH, Mount="Surface Mount", Number of I/Os=22, Number of Pins=32, Number of Programmable I/O=22, Number of PWM Channels=5, Number of SPI Channels=1, Number of Timers/Counters=2, Oscillator Type=Internal, Peripherals="Brown-out Detect/Reset, POR, PWM, WDT", Pricing 1="1=3.24, 25=2.97, 100=2.7 (USD)", Projected EOL Date=2039-11-08, RAM Size=512B, REACH SVHC=No, RoHS=Compliant, Schedule B="8542310000, 8542310000|8542310000|8542310000|8542310000|8542310000|8542310000|8542310000|8542310000|8542310000|8542310000|8542310000|8542310000|8542310000|8542310000|8542310000|8542310000|8542310000|8542310000|8542310000|8542310000|8542310000|8542310000|8542310000|85", Stock 1=27380, Supplier 1=DigiKey, Watchdog Timer=Yes, Width=7mm
U3: "LDO Regulator Pos 3.3V 1.5A 6-Pin(5+Tab) SOT-223 T/R", Case/Package=SOT-223, Dropout Voltage=340mV, Input Bias Current=1mA, Manufacturer="Texas Instruments", Manufacturer Lifecycle Status=ACTIVE, Max Input Voltage=20V, Max Operating Temperature=125°C, Max Output Current=1.5A, Max Output Voltage=3.3V, Min Current Limit=1.6A, Min Input Voltage=2.1V, Min Operating Temperature=-40°C, Supplier Part Number 1=296-24534-1-ND, Accuracy=3%, Category="LDO Voltage Regulators", ComponentLink1Description=https://sigma.octopart.com:443/157894086/technical_drawing/Texas-Instruments-TL1963A-33DCQR.pdf?src-supplier=Texas+Instruments, ComponentLink1URL=https://sigma.octopart.com:443/157894086/technical_drawing/Texas-Instruments-TL1963A-33DCQR.pdf?src-supplier=Texas+Instruments, ComponentLink2Description=https://octopart.com:443/opatz8j6/c1?t=4ngeq7EG4wbmsXmhTZORUFv5u7NofBFIW52e9VYbxmVdayzo9FD3iKLF5HCJW0A0b7UjNNNS-DgCsBrLhjlpmoKokMPf7vUIVZAWM-YugU8vndMkjsD40BmWhbpwA9Vb9wAHBV_LwCq6tqOTB6vDhZTtyDdbAt7fa2hmJYrMsuFbj1J98r-ghyhfK6bjzPe8JkXHltRcS3p08e7r81iYDdWgG0bYbh_rS7MPWEZEFqMHbb3RSh_AkY-GWbbTD82qadHur3jAuxU1xZdauqKIepWLf1E24hJe177nu7VOA2h6tLNrs5Elh3ojLUmt6ssCpJUFH4FjwlfTQ_BihWxNfHLKwM-7u7QzpGO0AWo9xfab0OdtIFy5rhOeDe13n8FwnN8WUxk&src-supplier=Texas+Instruments, ComponentLink2URL=https://octopart.com:443/opatz8j6/c1?t=4ngeq7EG4wbmsXmhTZORUFv5u7NofBFIW52e9VYbxmVdayzo9FD3iKLF5HCJW0A0b7UjNNNS-DgCsBrLhjlpmoKokMPf7vUIVZAWM-YugU8vndMkjsD40BmWhbpwA9Vb9wAHBV_LwCq6tqOTB6vDhZTtyDdbAt7fa2hmJYrMsuFbj1J98r-ghyhfK6bjzPe8JkXHltRcS3p08e7r81iYDdWgG0bYbh_rS7MPWEZEFqMHbb3RSh_AkY-GWbbTD82qadHur3jAuxU1xZdauqKIepWLf1E24hJe177nu7VOA2h6tLNrs5Elh3ojLUmt6ssCpJUFH4FjwlfTQ_BihWxNfHLKwM-7u7QzpGO0AWo9xfab0OdtIFy5rhOeDe13n8FwnN8WUxk&src-supplier=Texas+Instruments, ComponentLink3Description=https://datasheet.octopart.com:443/TL1963A-33DCQR-Texas-Instruments-datasheet-36835243.pdf?src-supplier=Texas+Instruments, ComponentLink3URL=https://datasheet.octopart.com:443/TL1963A-33DCQR-Texas-Instruments-datasheet-36835243.pdf?src-supplier=Texas+Instruments, ComponentLink4Description=https://sigma.octopart.com:443/49257225/technical_drawing/Texas-Instruments-TL1963A-33DCQR.pdf?src-supplier=Texas+Instruments, ComponentLink4URL=https://sigma.octopart.com:443/49257225/technical_drawing/Texas-Instruments-TL1963A-33DCQR.pdf?src-supplier=Texas+Instruments, ComponentLink5Description=https://datasheet.octopart.com:443/TL1963A-33DCQR-Texas-Instruments-datasheet-10255270.pdf?src-supplier=Texas+Instruments, ComponentLink5URL=https://datasheet.octopart.com:443/TL1963A-33DCQR-Texas-Instruments-datasheet-10255270.pdf?src-supplier=Texas+Instruments, ComponentLink6Description=https://datasheet.octopart.com:443/TL1963A-33DCQR-Texas-Instruments-datasheet-159117591.pdf?src-supplier=Augswan, ComponentLink6URL=https://datasheet.octopart.com:443/TL1963A-33DCQR-Texas-Instruments-datasheet-159117591.pdf?src-supplier=Augswan, ComponentLink7Description=http://sigma.octopart.com:80/conflict_mineral_statement/Texas-Instruments-company-63.pdf?src-supplier=Compliance+Statements, ComponentLink7URL=http://sigma.octopart.com:80/conflict_mineral_statement/Texas-Instruments-company-63.pdf?src-supplier=Compliance+Statements, ComponentLink8Description=http://sigma.octopart.com:80/reach_statement/Texas-Instruments-company-64.pdf?src-supplier=Compliance+Statements, ComponentLink8URL=http://sigma.octopart.com:80/reach_statement/Texas-Instruments-company-64.pdf?src-supplier=Compliance+Statements, Contact Plating=Gold, Height=0m, Lead Free="Lead Free", Length=6.5mm, Lifecycle Status=Production, Manufacturer Part Number=TL1963A-33DCQR, Min Output Voltage=3.3V, Number of Outputs=1, Number of Pins=6, Number of Regulators=1, Output Current=1.5A, Output Type=Fixed, Output Voltage=3.3V, Packaging="Tape and Reel", Polarity=Positive, Pricing 1="1=3.4, 10=2.559, 25=2.348, 100=2.1156, 250=2.00476, 500=1.93796, 1000=1.88298 (USD)", Quiescent Current=1mA, Radiation Hardening=No, RoHS=Compliant, Schedule B="8542390000, 8542390000|8542390000|8542390000|8542390000|8542390000", Stock 1=7700, Supplier 1=DigiKey, Thickness=1.6mm, Width=3.5mm
U4 U5 U6 U7: "1-ch, 2-input 2-V to 5.5-V high-speed (9 ns) AND gate with open-drain outputs 5-SOT-23 -55 to 125", Ambient Temperature Range High=125°C, Case/Package=SOT-23, Low Level Output Current=8mA, Manufacturer="Texas Instruments", Manufacturer Lifecycle Status=ACTIVE, Max Junction Temperature (Tj)=150°C, Max Supply Voltage=5.5V, Min Operating Temperature=-55°C, Min Supply Voltage=2V, Nominal Supply Current=1µA, Output Current=25mA, Supplier Part Number 1=296-29202-1-ND, Category="Logic Gates", ComponentLink1Description=https://sigma.octopart.com:443/177332311/technical_drawing/Texas-Instruments-SN74AHC1G09DBVR.pdf?src-supplier=Texas+Instruments, ComponentLink1URL=https://sigma.octopart.com:443/177332311/technical_drawing/Texas-Instruments-SN74AHC1G09DBVR.pdf?src-supplier=Texas+Instruments, ComponentLink2Description=https://octopart.com:443/opatz8j6/c1?t=bqADLDl8EGJa-abK3-ePlvr575PNeCs6LEhdaB0WqFXgxoC7OnaG2D22nC57WBUZ8e0w2INjc_LFQdyQHozOPCyH6tX4ELtsqPs8wOv1Yux_PXfy08ZdIMRjnQV5lLhZfRpi5eeTv9xc955rcCYeAcjMbXtzzBS_72cxjtahTWQIK5igcjO1cY3vHkxPwbDA7-P2RZ3KdH_6Dvsf-ptgMsDQEMs3i6mxb_DljwupIzUmwiXDH17gL_7gaX5IqCn_6glE62BgTidBLlDaZs0tx5ULuA3rR1prZLpFM62Z9wrEeKzcFEoOWyuSuMiZeKCcQ2g-rAsBL2iBqFvHdA0lo-ahwxtSHzn2Sok82lxAW1AHS-Nnbsq8TUoWPP_OAC6ZnW_Cu0-tmJw&src-supplier=Texas+Instruments, ComponentLink2URL=https://octopart.com:443/opatz8j6/c1?t=bqADLDl8EGJa-abK3-ePlvr575PNeCs6LEhdaB0WqFXgxoC7OnaG2D22nC57WBUZ8e0w2INjc_LFQdyQHozOPCyH6tX4ELtsqPs8wOv1Yux_PXfy08ZdIMRjnQV5lLhZfRpi5eeTv9xc955rcCYeAcjMbXtzzBS_72cxjtahTWQIK5igcjO1cY3vHkxPwbDA7-P2RZ3KdH_6Dvsf-ptgMsDQEMs3i6mxb_DljwupIzUmwiXDH17gL_7gaX5IqCn_6glE62BgTidBLlDaZs0tx5ULuA3rR1prZLpFM62Z9wrEeKzcFEoOWyuSuMiZeKCcQ2g-rAsBL2iBqFvHdA0lo-ahwxtSHzn2Sok82lxAW1AHS-Nnbsq8TUoWPP_OAC6ZnW_Cu0-tmJw&src-supplier=Texas+Instruments, ComponentLink3Description=https://datasheet.octopart.com:443/SN74AHC1G09DBVR-Texas-Instruments-datasheet-37726925.pdf?src-supplier=Texas+Instruments, ComponentLink3URL=https://datasheet.octopart.com:443/SN74AHC1G09DBVR-Texas-Instruments-datasheet-37726925.pdf?src-supplier=Texas+Instruments, ComponentLink4Description=https://sigma.octopart.com:443/175570406/technical_drawing/Texas-Instruments-SN74AHC1G09DBVR.pdf?src-supplier=Texas+Instruments, ComponentLink4URL=https://sigma.octopart.com:443/175570406/technical_drawing/Texas-Instruments-SN74AHC1G09DBVR.pdf?src-supplier=Texas+Instruments, ComponentLink5Description=https://sigma.octopart.com:443/169406034/technical_drawing/Texas-Instruments-SN74AHC1G09DBVR.pdf?src-supplier=Texas+Instruments, ComponentLink5URL=https://sigma.octopart.com:443/169406034/technical_drawing/Texas-Instruments-SN74AHC1G09DBVR.pdf?src-supplier=Texas+Instruments, ComponentLink6Description=https://sigma.octopart.com:443/155939316/technical_drawing/Texas-Instruments-SN74AHC1G09DBVR.pdf?src-supplier=Texas+Instruments, ComponentLink6URL=https://sigma.octopart.com:443/155939316/technical_drawing/Texas-Instruments-SN74AHC1G09DBVR.pdf?src-supplier=Texas+Instruments, ComponentLink7Description=https://sigma.octopart.com:443/102331370/technical_drawing/Texas-Instruments-SN74AHC1G09DBVR.pdf?src-supplier=Texas+Instruments, ComponentLink7URL=https://sigma.octopart.com:443/102331370/technical_drawing/Texas-Instruments-SN74AHC1G09DBVR.pdf?src-supplier=Texas+Instruments, ComponentLink8Description=https://sigma.octopart.com:443/49249325/technical_drawing/Texas-Instruments-SN74AHC1G09DBVR.pdf?src-supplier=Texas+Instruments, ComponentLink8URL=https://sigma.octopart.com:443/49249325/technical_drawing/Texas-Instruments-SN74AHC1G09DBVR.pdf?src-supplier=Texas+Instruments, ComponentLink9Description=https://datasheet.octopart.com:443/SN74AHC1G09DBVR-Texas-Instruments-datasheet-21221312.pdf?src-supplier=Upverter, ComponentLink9URL=https://datasheet.octopart.com:443/SN74AHC1G09DBVR-Texas-Instruments-datasheet-21221312.pdf?src-supplier=Upverter, ComponentLink10Description=https://datasheet.octopart.com:443/SN74AHC1G09DBVR-Texas-Instruments-datasheet-62088831.pdf?src-supplier=Newark, ComponentLink10URL=https://datasheet.octopart.com:443/SN74AHC1G09DBVR-Texas-Instruments-datasheet-62088831.pdf?src-supplier=Newark, ComponentLink11Description=https://datasheet.octopart.com:443/SN74AHC1G09DBVR-Texas-Instruments-datasheet-33010737.pdf?src-supplier=Newark, ComponentLink11URL=https://datasheet.octopart.com:443/SN74AHC1G09DBVR-Texas-Instruments-datasheet-33010737.pdf?src-supplier=Newark, ComponentLink12Description=https://datasheet.octopart.com:443/SN74AHC1G09DBVR-Texas-Instruments-datasheet-159115775.pdf?src-supplier=SHENGYU+ELECTRONICS, ComponentLink12URL=https://datasheet.octopart.com:443/SN74AHC1G09DBVR-Texas-Instruments-datasheet-159115775.pdf?src-supplier=SHENGYU+ELECTRONICS, ComponentLink13Description=https://datasheet.octopart.com:443/SN74AHC1G09DBVR-Texas-Instruments-datasheet-165804331.pdf?src-supplier=LCSC, ComponentLink13URL=https://datasheet.octopart.com:443/SN74AHC1G09DBVR-Texas-Instruments-datasheet-165804331.pdf?src-supplier=LCSC, ComponentLink14Description=https://datasheet.octopart.com:443/SN74AHC1G09DBVR-Texas-Instruments-datasheet-140571641.pdf?src-supplier=Arrow.cn, ComponentLink14URL=https://datasheet.octopart.com:443/SN74AHC1G09DBVR-Texas-Instruments-datasheet-140571641.pdf?src-supplier=Arrow.cn, ComponentLink15Description=https://datasheet.octopart.com:443/SN74AHC1G09DBVR-Texas-Instruments-datasheet-11780427.pdf?src-supplier=Arrow+Electronics, ComponentLink15URL=https://datasheet.octopart.com:443/SN74AHC1G09DBVR-Texas-Instruments-datasheet-11780427.pdf?src-supplier=Arrow+Electronics, ComponentLink16Description=http://sigma.octopart.com:80/conflict_mineral_statement/Texas-Instruments-company-63.pdf?src-supplier=Compliance+Statements, ComponentLink16URL=http://sigma.octopart.com:80/conflict_mineral_statement/Texas-Instruments-company-63.pdf?src-supplier=Compliance+Statements, ComponentLink17Description=http://sigma.octopart.com:80/reach_statement/Texas-Instruments-company-64.pdf?src-supplier=Compliance+Statements, ComponentLink17URL=http://sigma.octopart.com:80/reach_statement/Texas-Instruments-company-64.pdf?src-supplier=Compliance+Statements, Contact Plating=Tin, Height=1.45mm, Lead Free="Lead Free", Length=2.9mm, Lifecycle Status=Production, Logic Function=AND, Manufacturer Part Number=SN74AHC1G09DBVR, Max Operating Temperature=125°C, Mount="Surface Mount", Number of Bits=1, Number of Channels=1, Number of Circuits=1, Number of Elements=1, Number of Gates=1, Number of Inputs=2, Number of Outputs=1, Number of Pins=5, Output Voltage=5.5V, Pricing 1="1=0.12, 10=0.082, 25=0.0716, 100=0.0602, 250=0.05484, 500=0.05162, 1000=0.04896 (USD)", Propagation Delay=4.6ns, Quiescent Current=1µA, Radiation Hardening=No, REACH SVHC=No, RoHS=Compliant, Schedule B="8542390000, 8542390000|8542390000|8542390000|8542390000|8542390000", Stock 1=30041, Supplier 1=DigiKey, Thickness=1.2mm, Width=1.6mm